# Altium PCB Copy of MC0202S_V0.91.pcbdoc
Units mm, origin at the board's own origin, x right, y up, seen from the top; angles counter-clockwise.
Board outline 121 x 80 mm, 4 copper layers (Top Layer, Mid-Layer 1, Mid-Layer 2, Bottom Layer); 151 components, 104 nets, 502 pads, 44 vias.
Unrouted connection lines stored in the file: 184.
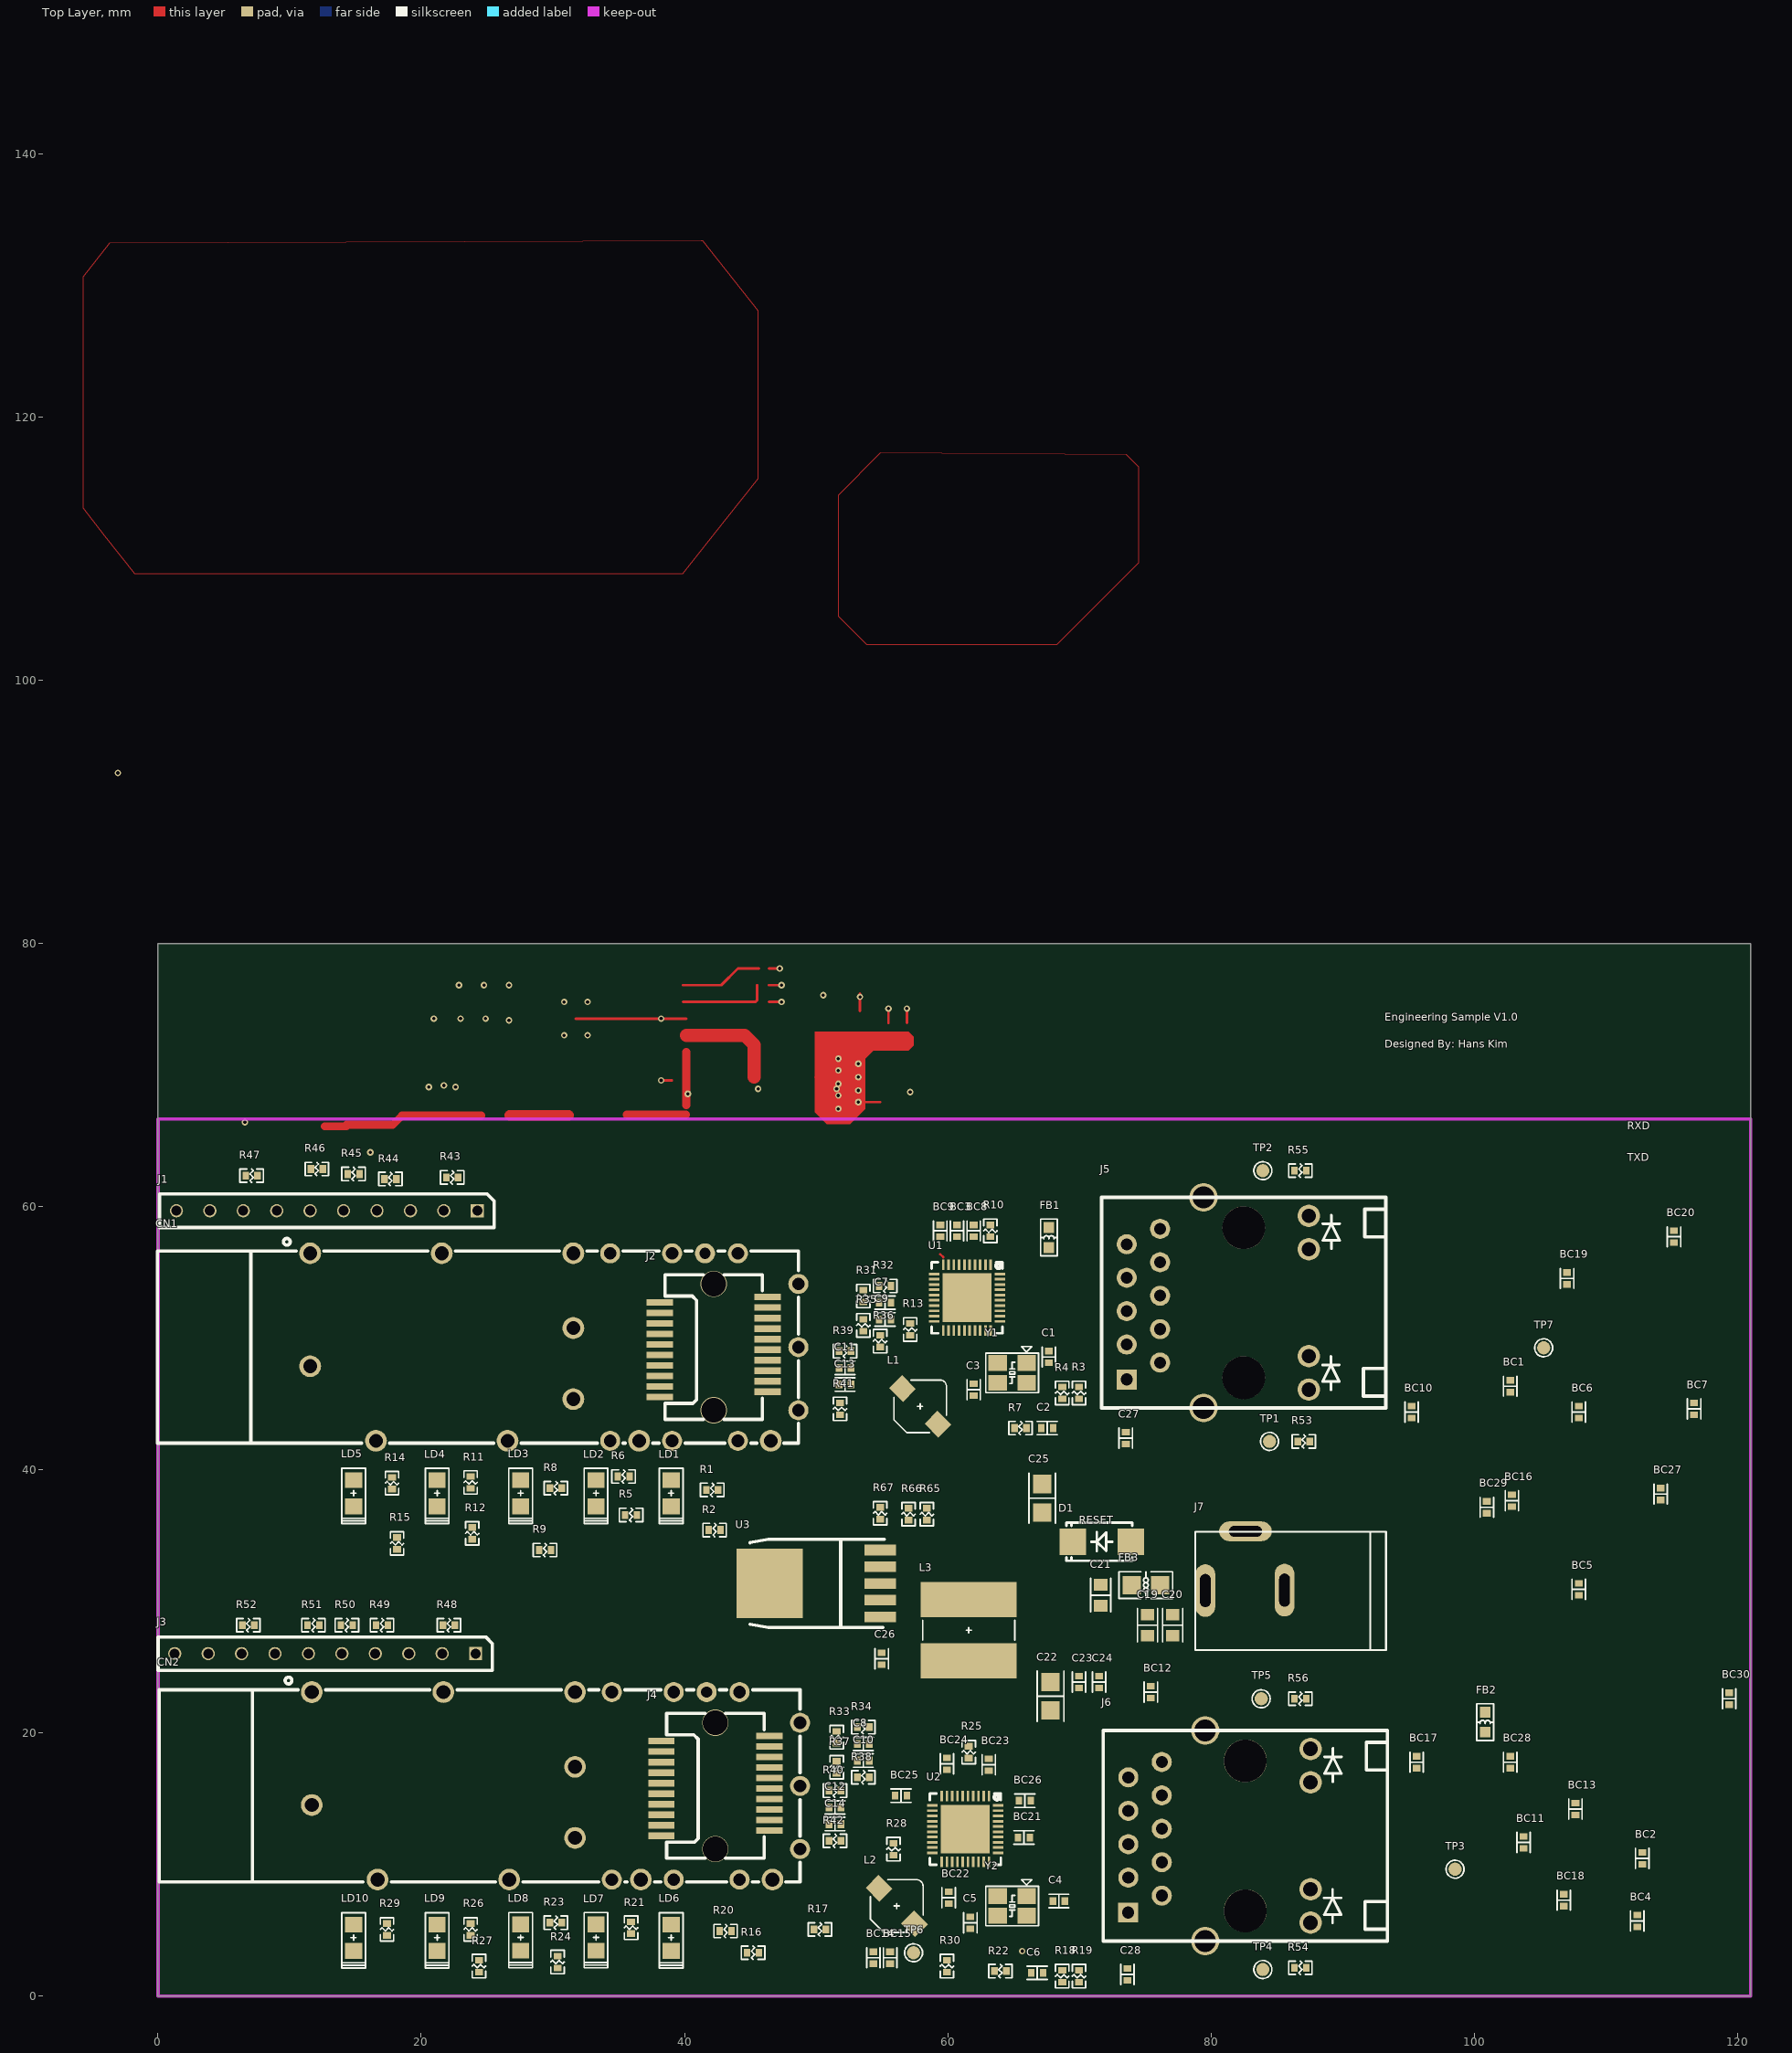
[diagram p0: Top Layer view]
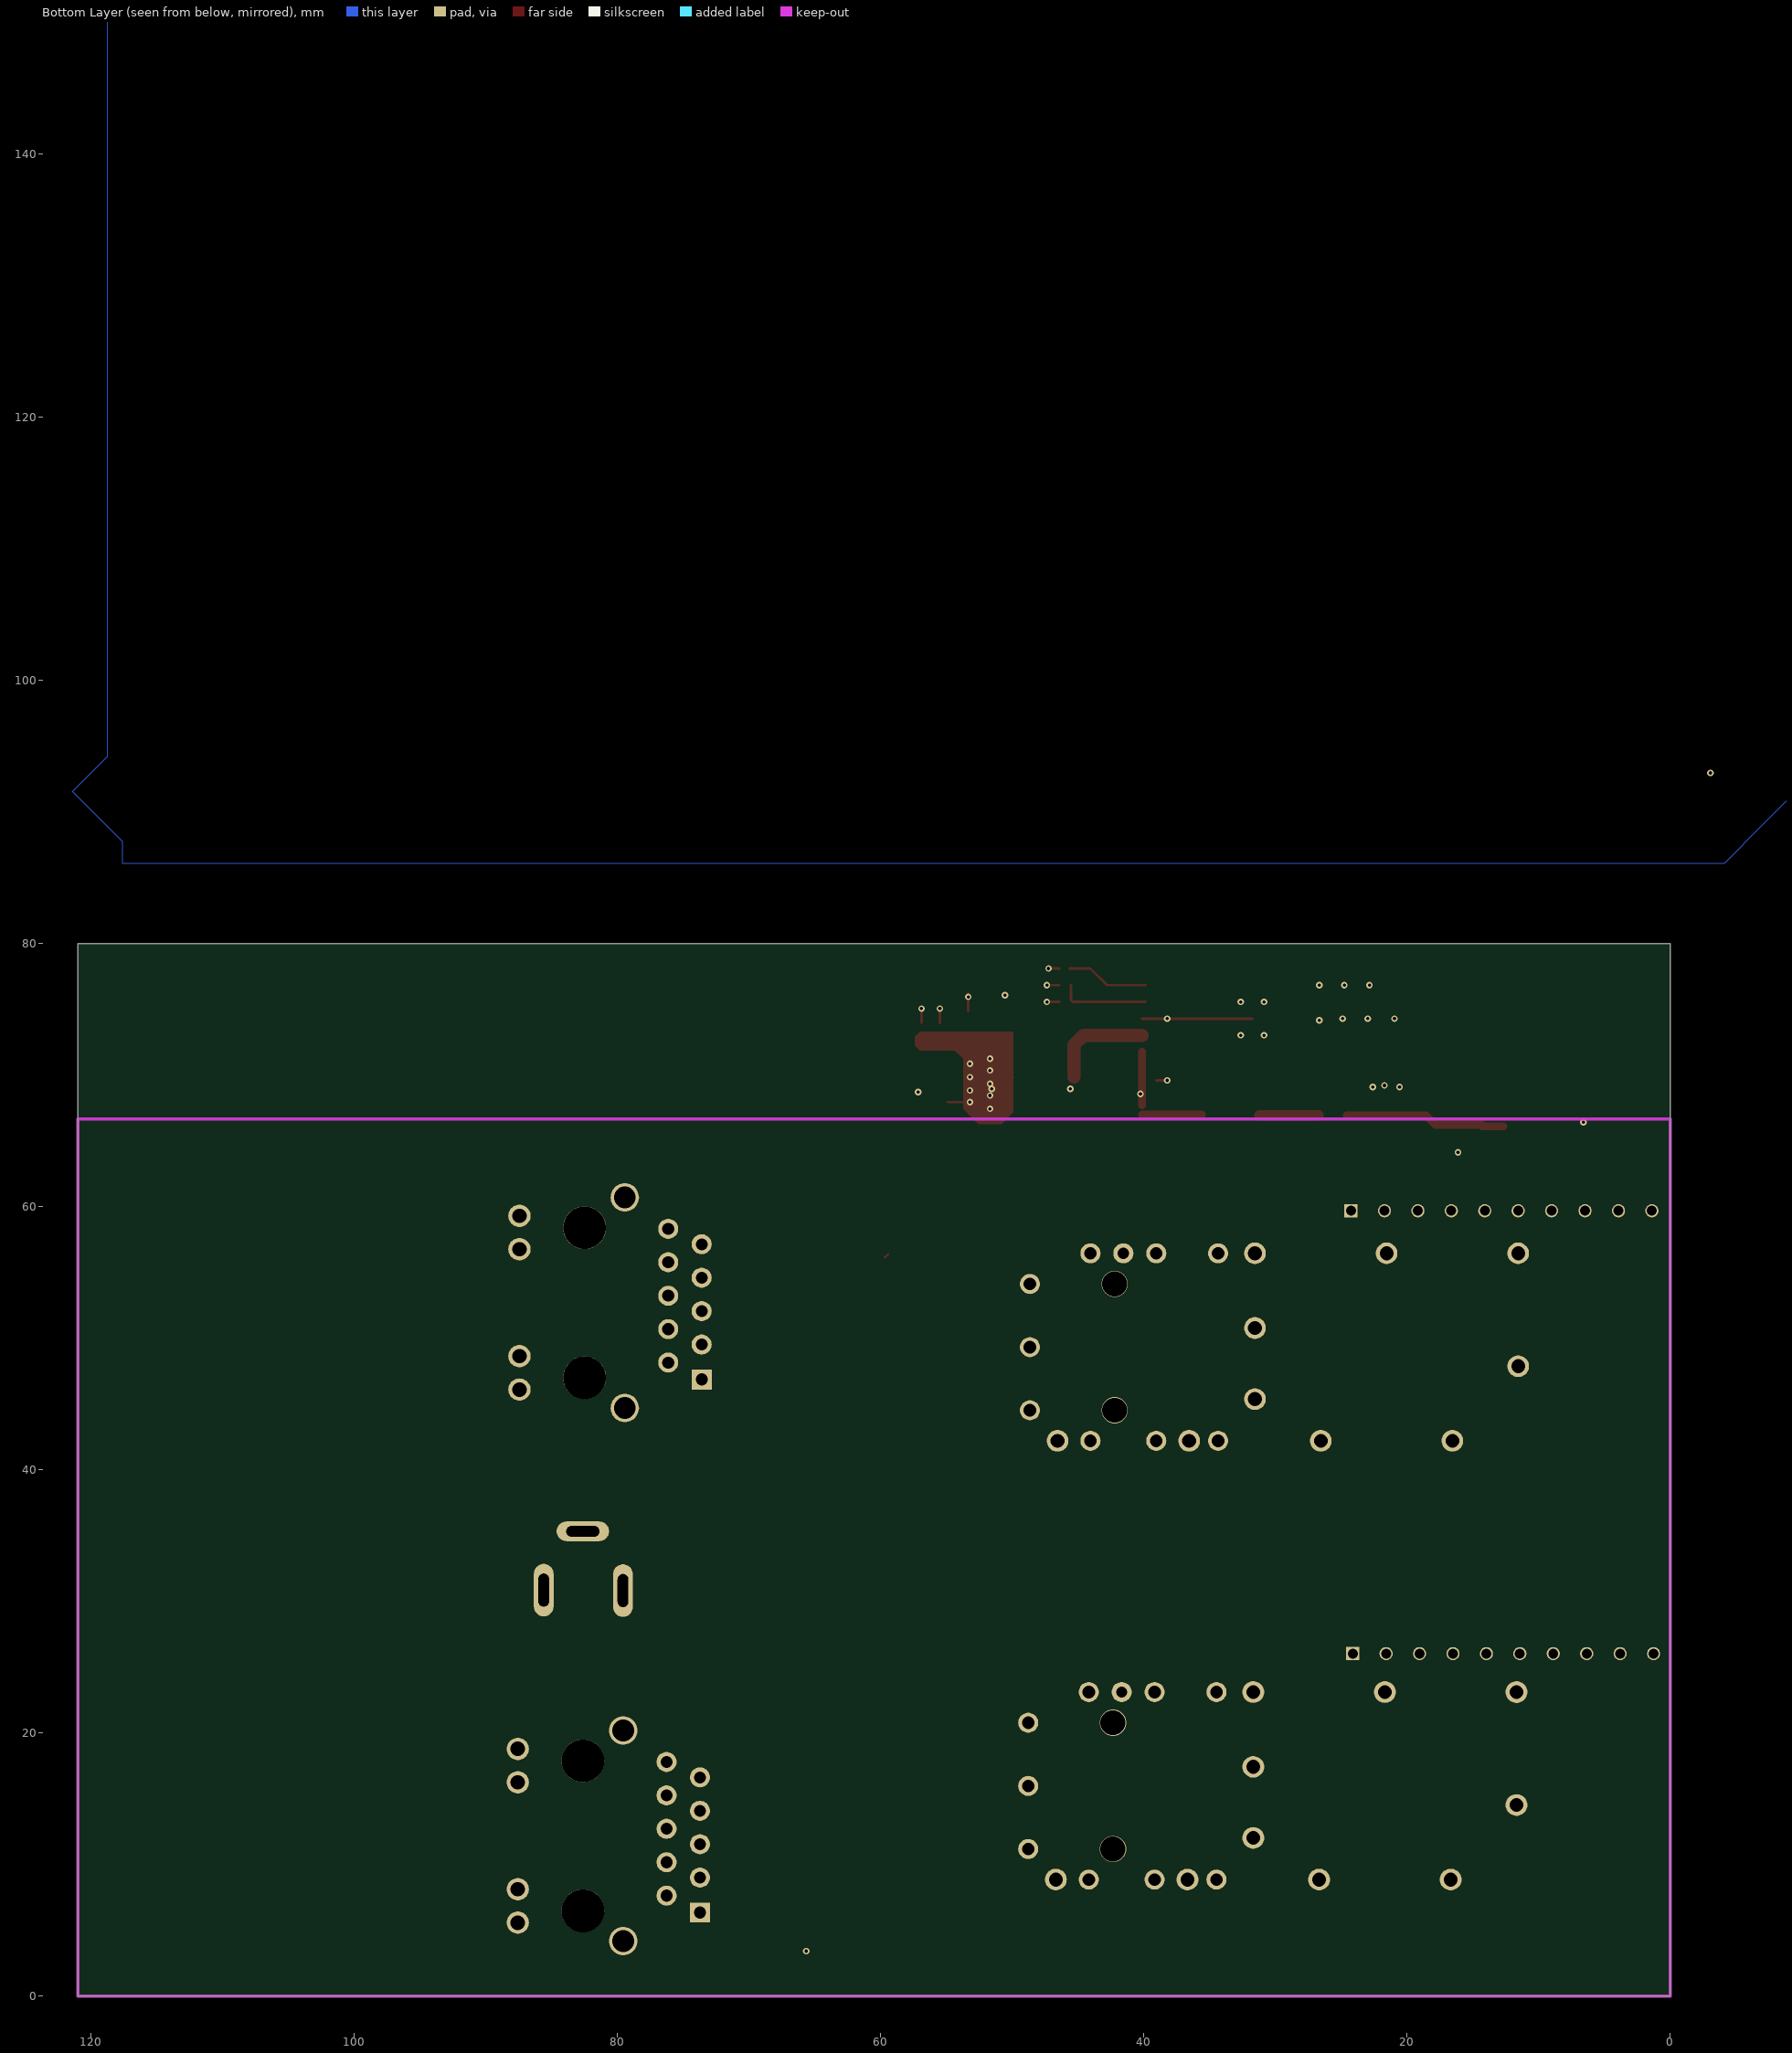
[diagram p1: Bottom Layer view, seen from below]
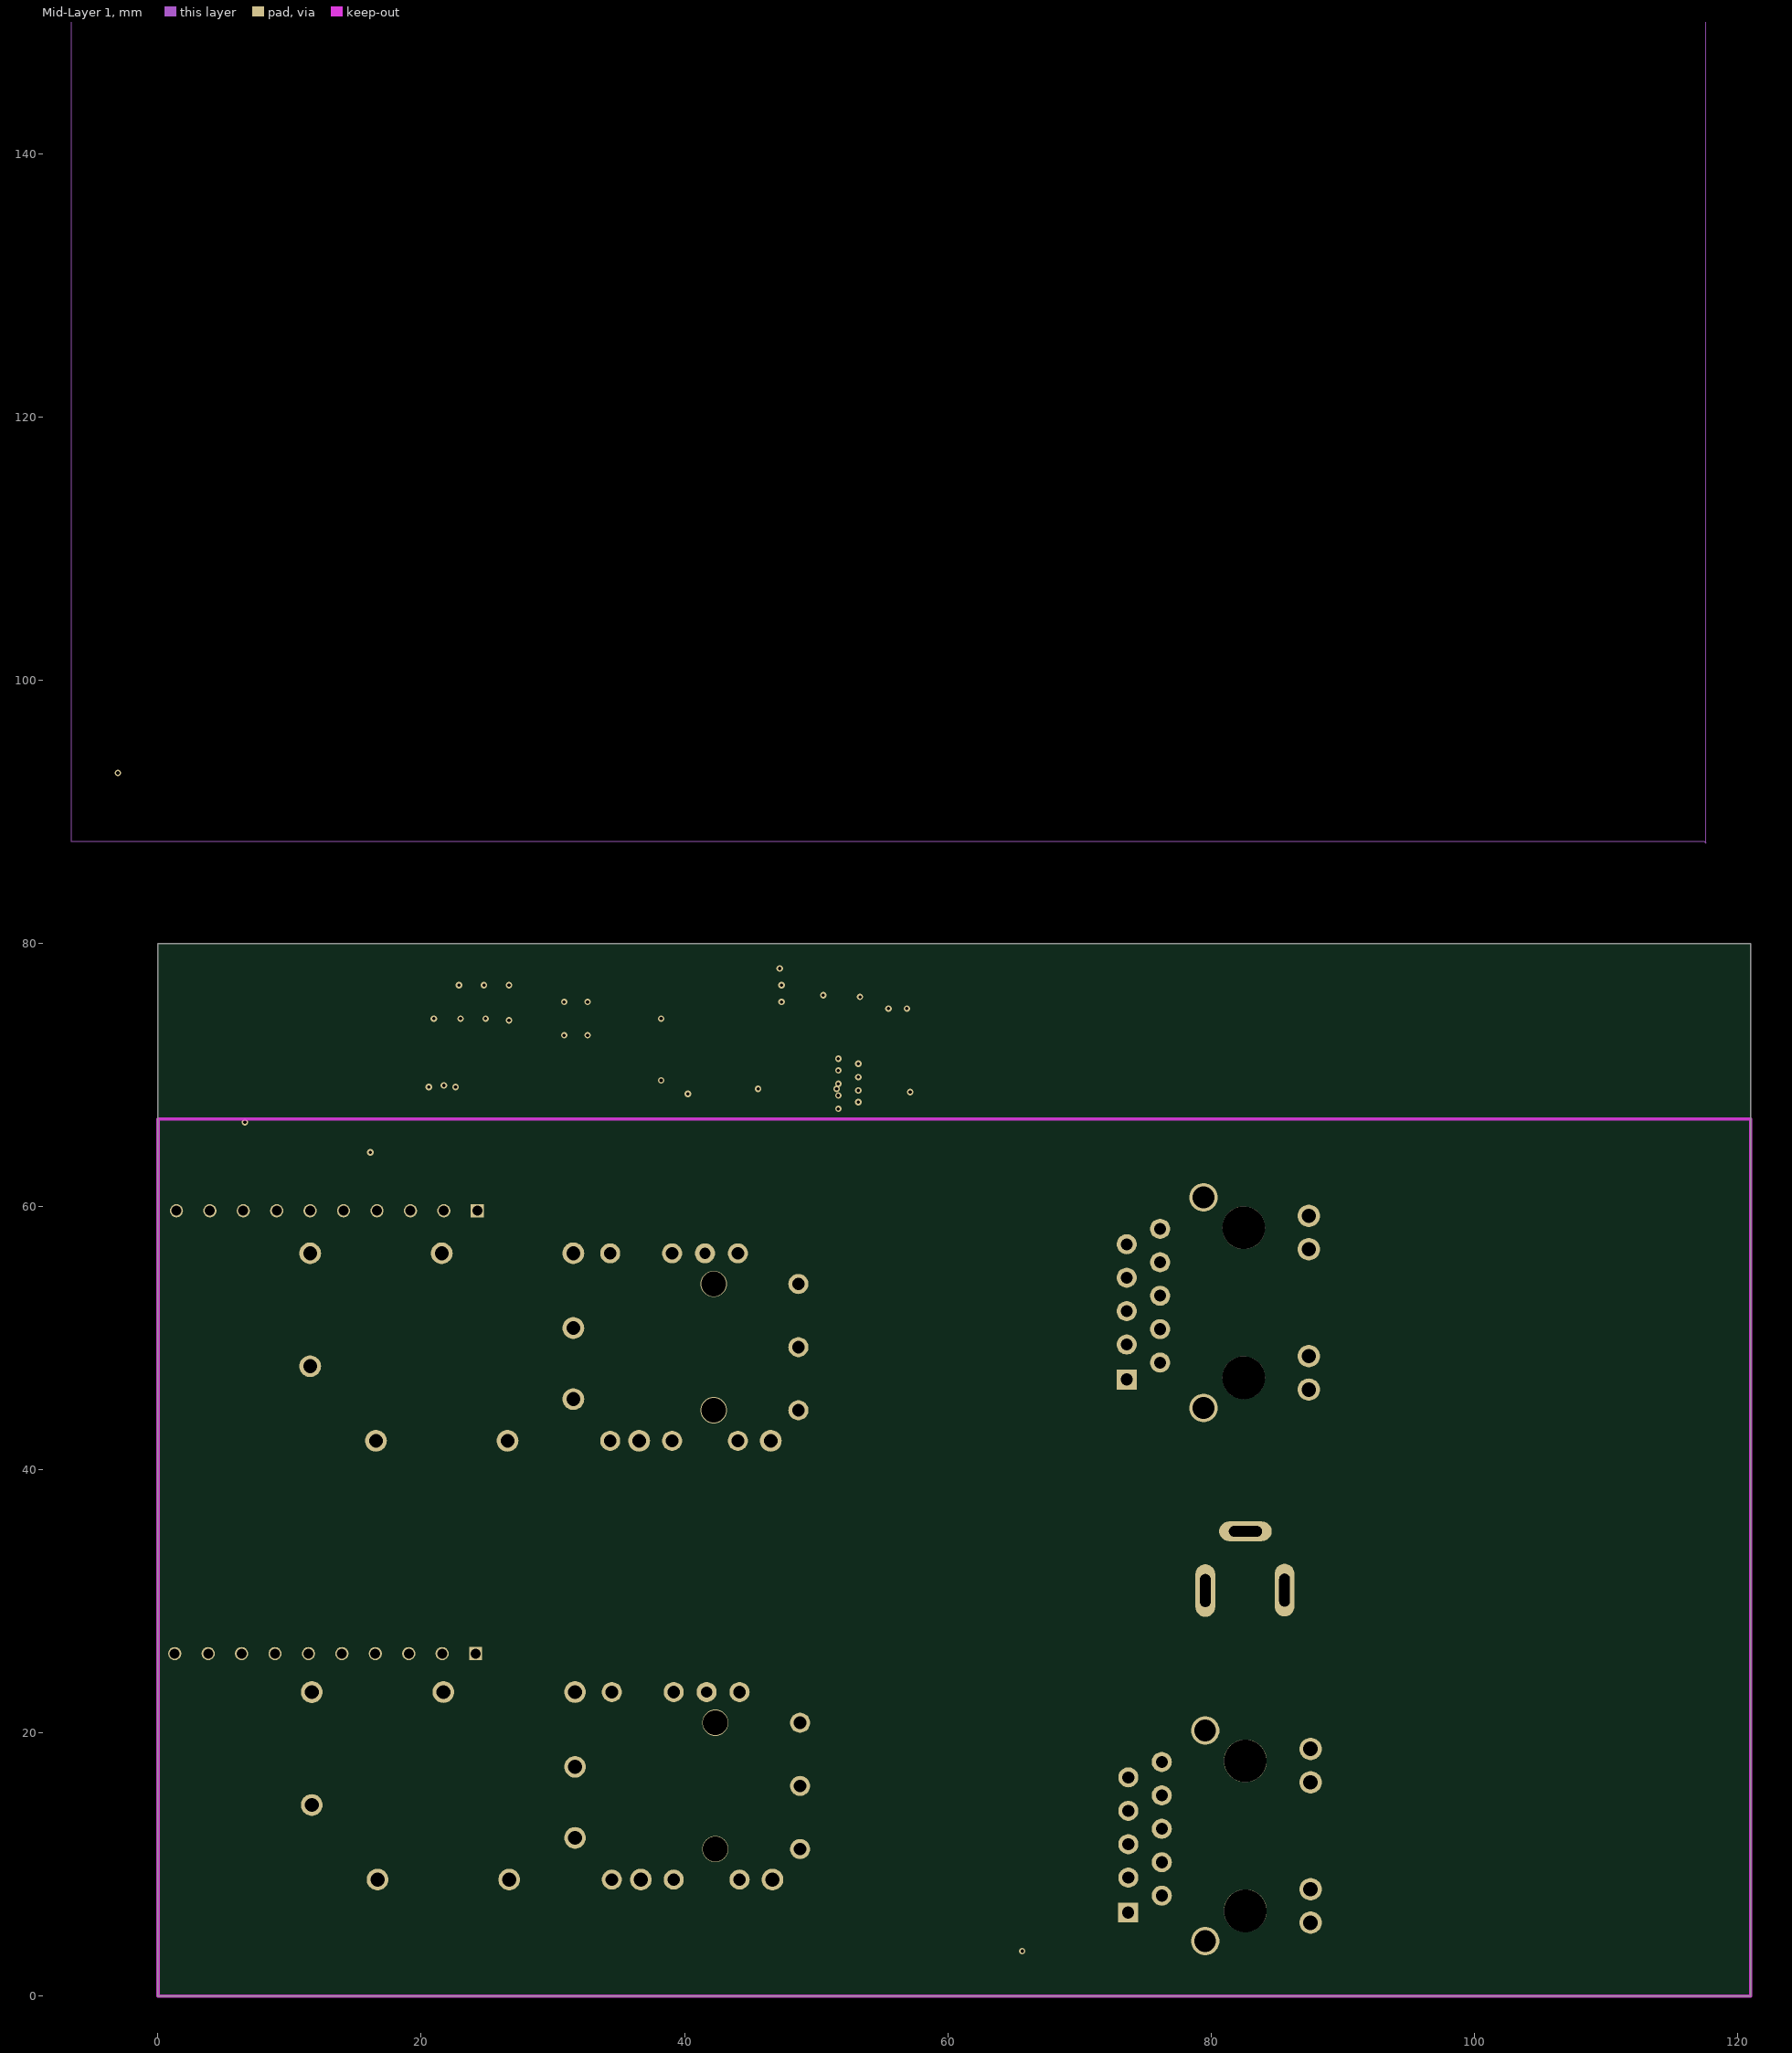
[diagram p2: Mid-Layer 1]
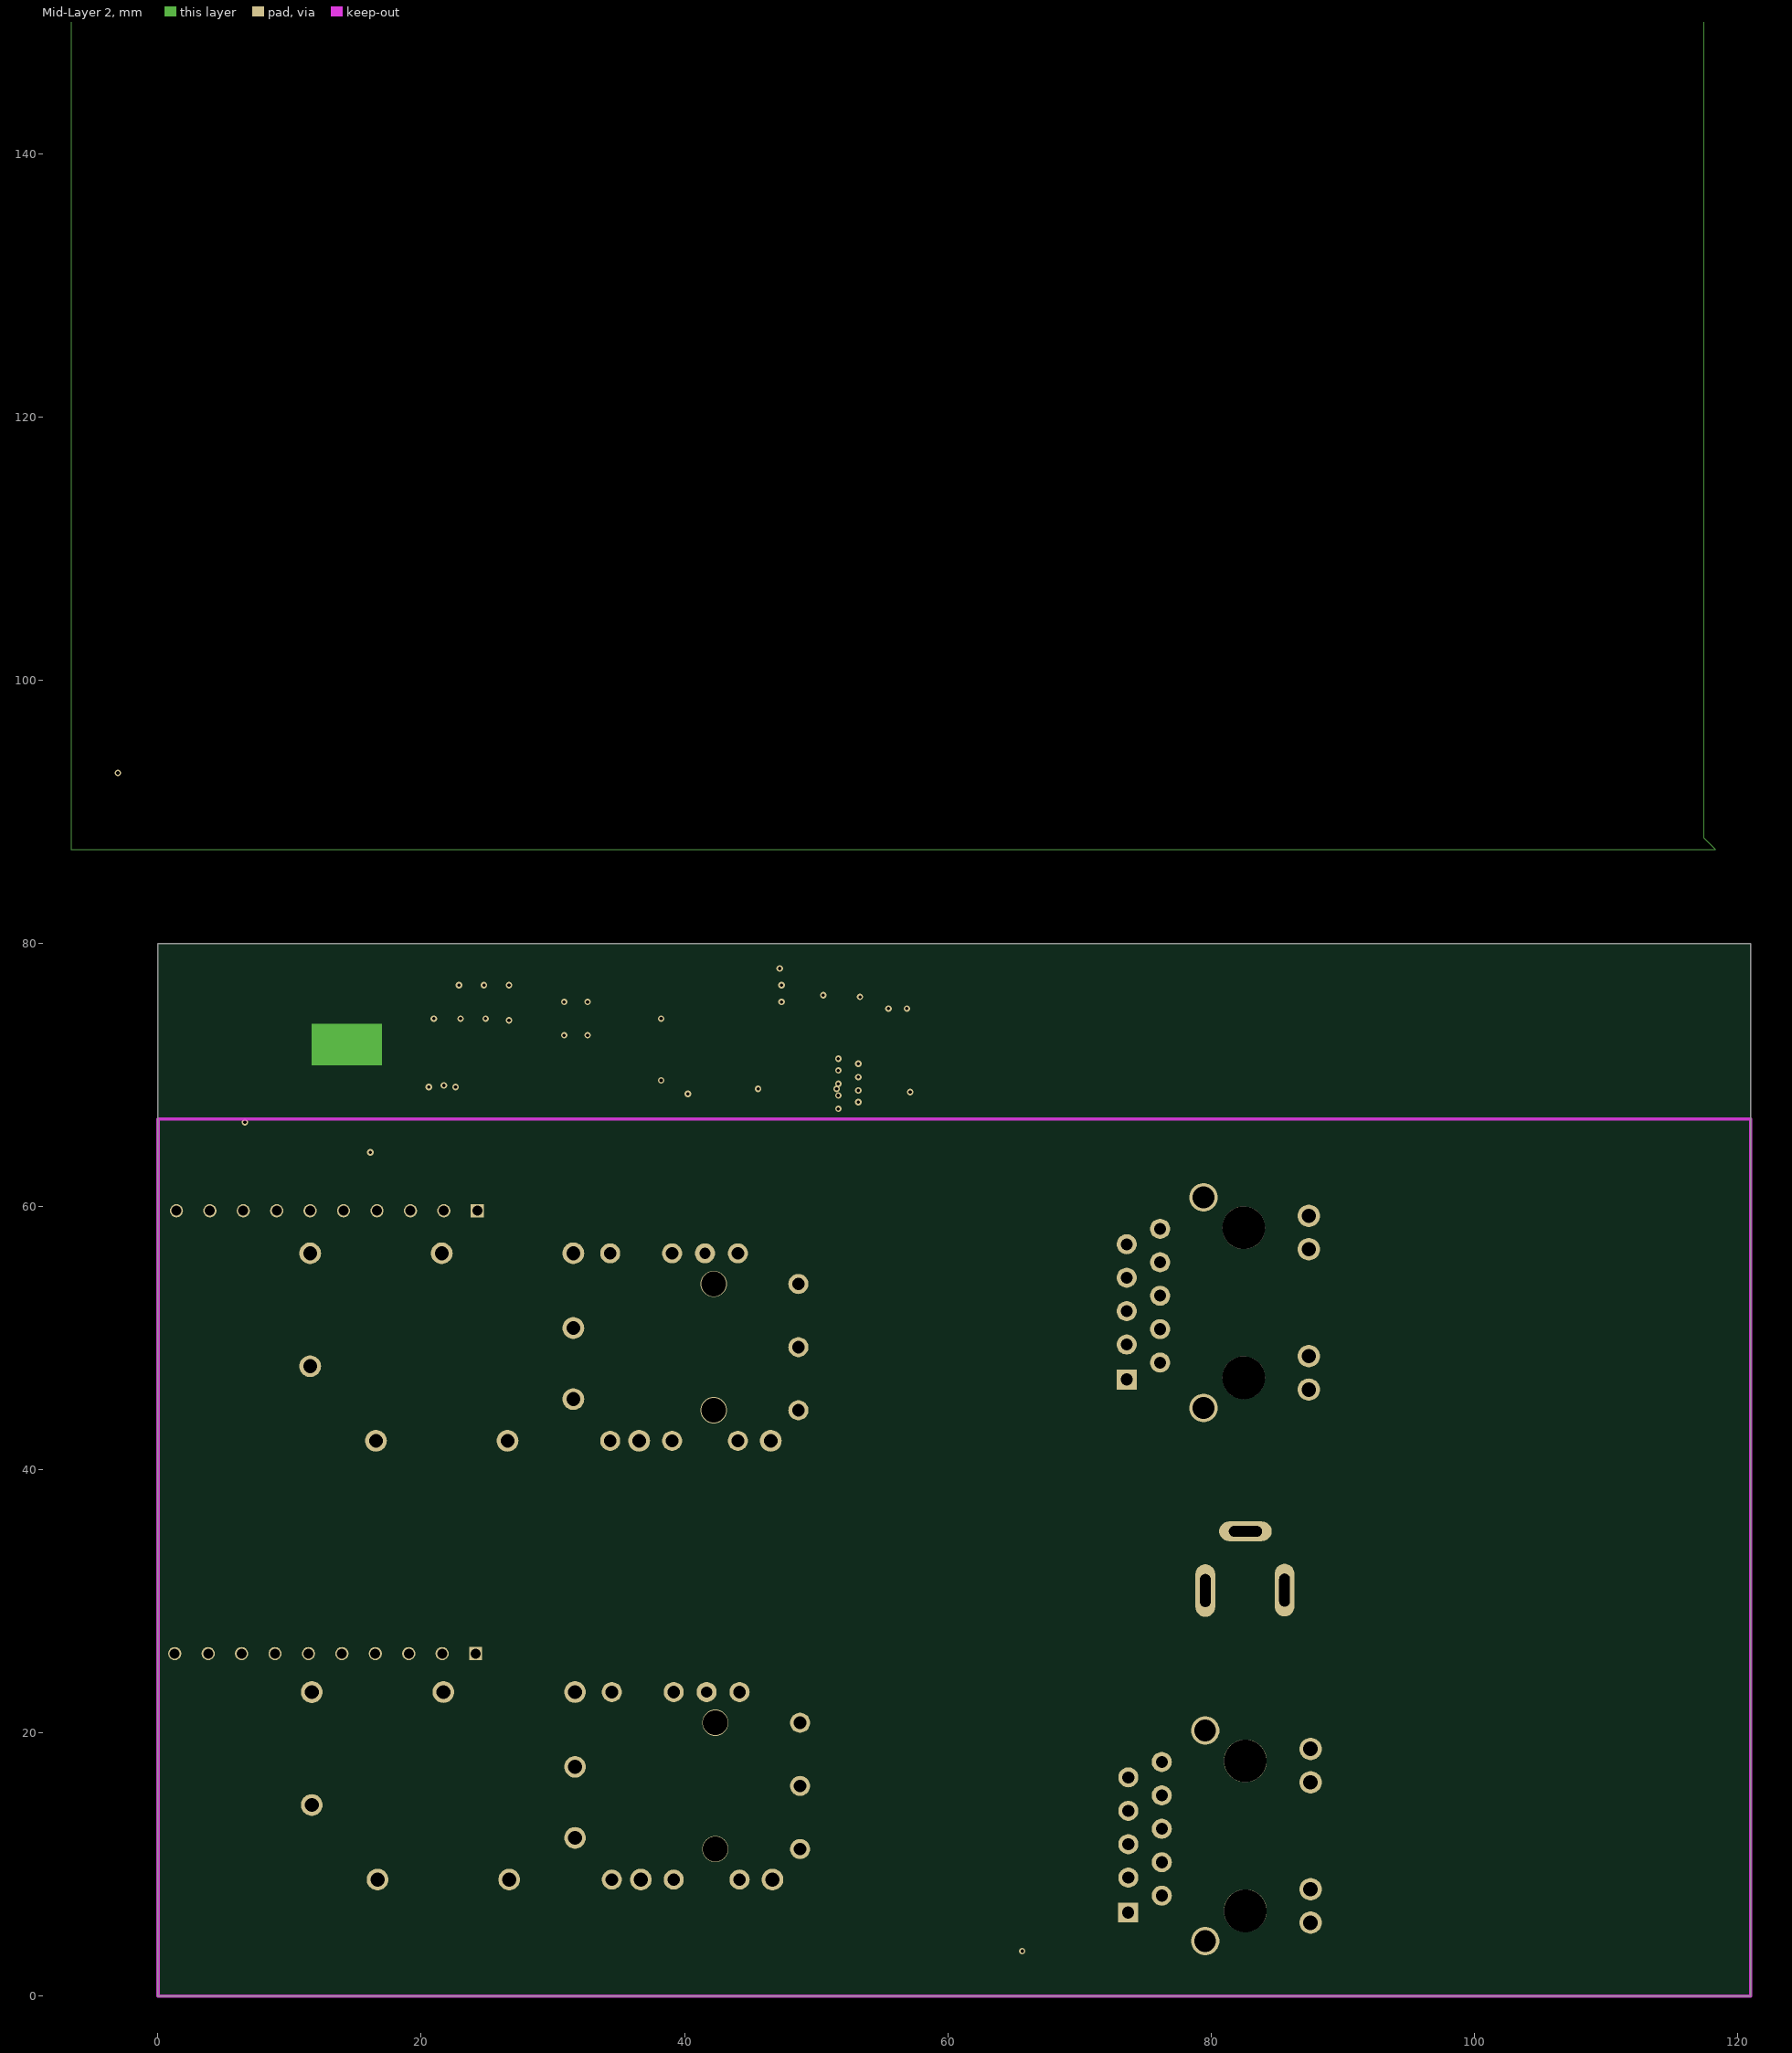
[diagram p3: Mid-Layer 2]

## Layer stack, top to bottom
Top Solder: solder mask 0.0102, Solder Resist, Dk 3.5
Top Layer: signal copper 0.0356
Dielectric1: dielectric 0.32, FR-4, Dk 4.8
Mid-Layer 1: signal copper 0.0356
Dielectric2: dielectric 0.32, FR-4, Dk 4.8
Mid-Layer 2: signal copper 0.0356
Dielectric3: dielectric 0.32, FR-4, Dk 4.8
Bottom Layer: signal copper 0.0356
Bottom Solder: solder mask 0.0102, Solder Resist, Dk 3.5

## Board outline
0,0 121,0 121,80 0,80

## Design rules (kind name [scope] priority, off if disabled: settings)
Clearance Clearance_4 [isRegion vs IsRegion] p1: gap=0.4 ignorepadtopadclearanceinfootprint=FALSE except(0: Arc-Hole Track-Hole SMDPad-Hole THPad-Hole Via-Hole Fill-Hole Poly-Hole Region-Hole Text-Hole)
Clearance Clearance_3 [HasFootprint('QFN-40_5X5') or HasFootprint('RP-4_1005') vs HasFootprint('QFN-40_5X5') or HasFootprint('RP-4_1005')] p2: gap=0.1 ignorepadtopadclearanceinfootprint=FALSE except(0: Arc-Hole Track-Hole SMDPad-Hole THPad-Hole Via-Hole Fill-Hole Poly-Hole Region-Hole Text-Hole)
Clearance Clearance_2 [InNetClass('ETH') vs InNetClass('ETH')] p3: gap=0.127 ignorepadtopadclearanceinfootprint=FALSE except(0: Arc-Hole Track-Hole SMDPad-Hole THPad-Hole Via-Hole Fill-Hole Poly-Hole Region-Hole Text-Hole)
Clearance Clearance_1 [isVia] p4: gap=0.1 ignorepadtopadclearanceinfootprint=FALSE except(0: Arc-Hole Track-Hole SMDPad-Hole THPad-Hole Via-Hole Fill-Hole Poly-Hole Region-Hole Text-Hole)
Clearance [All] p5: gap=0.2 ignorepadtopadclearanceinfootprint=FALSE except(0: Arc-Hole Track-Hole SMDPad-Hole THPad-Hole Via-Hole Fill-Hole Poly-Hole Region-Hole Text-Hole)
ComponentClearance ComponentClearance_1 [InComponent('CN1') or InComponent('CN2') vs InComponent('J2') or InComponent('J4')] p1: gap=0 collisioncheckmode=3 verticalgap=0 showdistances=FALSE
ComponentClearance [All] p2: gap=0.1 collisioncheckmode=3 verticalgap=0.1 showdistances=FALSE
HoleSize [All] p1: absolutevalues=TRUE maxlimit=5.12 minlimit=0.025 maxpercent=80.000 minpercent=20.000
MinimumSolderMaskSliver MinimumSolderMaskSliver_2 [isVia vs isVia] p1: minsoldermaskwidth=0.1
MinimumSolderMaskSliver MinimumSolderMaskSliver_1 [IsPad vs isPad] p2: minsoldermaskwidth=0.05
MinimumSolderMaskSliver [All] p3: minsoldermaskwidth=0.1
PolygonConnect [All] p1: connectstyle=Relief reliefconductorwidth=0.254 reliefentries=4 polygonreliefangle="90 Angle" airgapwidth=0.254
RoutingVias [All] p1: holewidth=0.25 width=0.5 viastyle="Through Hole" minholewidth=0.25 minwidth=0.5 maxholewidth=0.25 maxwidth=0.5
SilkToSilkClearance [All] p1: silktosilkclearance=0.01
SilkToSolderMaskClearance [IsPad] p1: minsilkscreentomaskgap=0 clearancetoexposedcopper=TRUE
SolderMaskExpansion [All] p1: expansion=0.102
Width Width_1 [InNetClass('ETH')] p1: maxlimit=0.127 minlimit=0.127 preferedwidth=0.127
Width [All] p2: maxlimit=1 minlimit=0.127 preferedwidth=0.2
25 further rules are at their usual default settings.

## Components (designator, comment, footprint, x,y, rotation, side; value= is the part's Value field where it differs from the comment)
BC1 "1uF" CS-1005 102.743,46.355 r90 top
BC2 "0.1uF" CS-1005 112.776,10.472 r90 top
BC3 "0.1uF" CS-1005 60.706,58.166 r90 top
BC4 "0.1uF" CS-1005 112.395,5.715 r90 top
BC5 "0.1uF" CS-1005 107.95,30.919 r90 top
BC6 "0.1uF" CS-1005 107.95,44.392 r90 top
BC7 "0.1uF" CS-1005 116.713,44.635 r90 top
BC8 "0.1uF" CS-1005 61.976,58.166 r90 top
BC9 "0.1uF" CS-1005 59.436,58.166 r90 top
BC10 "0.1uF" CS-1005 95.25,44.392 r90 top
BC11 "0.1uF" CS-1005 103.759,11.684 r90 top
BC12 "0.1uF" CS-1005 75.438,23.114 r90 top
BC13 "0.1uF" CS-1005 107.696,14.224 r90 top
BC14 "1uF" CS-1005 54.356,2.921 r270 top
BC15 "0.1uF" CS-1005 55.626,2.921 r270 top
BC16 "0.1uF" CS-1005 102.87,37.661 r90 top
BC17 "0.1uF" CS-1005 95.631,17.78 r90 top
BC18 "0.1uF" CS-1005 106.807,7.297 r90 top
BC19 "0.1uF" CS-1005 107.061,54.552 r90 top
BC20 "0.1uF" CS-1005 115.189,57.716 r90 top
BC21 "0.1uF" CS-1005 65.786,12.065 r0 top
BC22 "0.1uF" CS-1005 60.071,7.493 r270 top
BC23 "0.1uF" CS-1005 63.119,17.584 r90 top
BC24 "0.1uF" CS-1005 59.944,17.653 r90 top
BC25 "0.1uF" CS-1005 56.457,15.24 r180 top
BC26 "0.1uF" CS-1005 65.855,14.859 r180 top
BC27 "0.1uF" CS-1005 114.173,38.158 r90 top
BC28 "1uF" CS-1005 102.743,17.78 r90 top
BC29 "0.1uF" CS-1005 100.965,37.153 r90 top
BC30 "1uF" CS-1005 119.38,22.606 r90 top
C1 "12pF" CS-1005 67.691,48.583 r90 top
C2 "0.1uF" CS-1005 67.564,43.18 r0 top
C3 "12pF" CS-1005 61.976,46.101 r270 top
C4 "12pF" CS-1005 68.453,7.239 r0 top
C5 "12pF" CS-1005 61.722,5.588 r270 top
C6 "0.1uF" CS-1005 66.802,1.778 r0 top
C7 "0.1uF" CS-1005 55.245,52.705 r0 top
C8 "0.1uF" CS-1005 53.594,19.177 r0 top
C9 "0.1uF" CS-1005 55.245,51.435 r0 top
C10 "0.1uF" CS-1005 53.594,17.907 r0 top
C11 "0.1uF" CS-1005 52.197,47.752 r0 top
C12 "0.1uF" CS-1005 51.435,14.351 r0 top
C13 "0.1uF" CS-1005 52.197,46.482 r0 top
C14 "0.1uF" CS-1005 51.435,13.081 r0 top
C19 "0.1uF" CS-1608 75.184,28.194 r270 top
C20 "1nF" CS-1608 77.089,28.194 r270 top
C21 "0.1uF" CS-1608 71.628,30.48 r270 top
C22 "10uF" CS-2012 67.818,22.796 r270 top
C23 "0.1uF" CS-1005 69.977,23.876 r270 top
C24 "10nF" CS-1005 71.501,23.876 r270 top
C25 "10uF" CS-2012 67.183,37.846 r90 top
C26 "0.1uF" CS-1005 54.991,25.654 r270 top
C27 "0.1uF" CS-1005 73.533,42.418 r90 top
C28 "0.1uF" CS-1005 73.66,1.651 r90 top
CN1 "TH_HC-SFP-01L" TH_HC-SFP-01L 30.107,49.334 r270 top
CN2 "TH_HC-SFP-01L" TH_HC-SFP-01L 30.234,15.989 r270 top
D1 "RB051L-40" SOD-106 71.714,34.544 r180 top
FB1 "600" LS-1608 67.691,57.658 r90 top
FB2 "600" LS-1608 100.838,20.828 r90 top
FB3 "60" LS-2012 75.057,31.242 r180 top
J1 "CON 10P" Header_2.54_10p 24.257,59.69 r180 top
J2 "KSP20LG154" KSP20LG154 42.219,49.334 r270 top
J3 "CON 10P" Header_2.54_10p 24.13,26.035 r180 top
J4 "KSP20LG154" KSP20LG154 42.346,15.989 r270 top
J5 "HR911130A" HR911130A 80.518,52.705 r90 top
J6 "HR911130A" HR911130A 80.645,12.192 r90 top
J7 "DC005" DC005 82.819,30.92 r270 top
L1 "2.2uH" CDRH3D16NP 57.912,44.831 r270 top
L2 "2.2uH" CDRH3D16NP 56.134,6.858 r270 top
L3 "100uH" CDRH6D38NP 61.595,27.813 r0 top
LD1 "LED" LED2012 38.989,38.227 r90 top
LD2 "LED" LED2012 33.274,38.227 r90 top
LD3 "LED" LED2012 27.559,38.227 r90 top
LD4 "LED" LED2012 21.209,38.227 r90 top
LD5 "LED" LED2012 14.859,38.227 r90 top
LD6 "LED" LED2012 38.989,4.445 r90 top
LD7 "LED" LED2012 33.274,4.461 r90 top
LD8 "LED" LED2012 27.559,4.461 r90 top
LD9 "LED" LED2012 21.209,4.445 r90 top
LD10 "LED" LED2012 14.859,4.445 r90 top
R1 "470" RS-1005 42.106,38.481 r0 top
R2 "4.7K" RS-1005 42.291,35.433 r0 top
R3 "4.7K" RS-1005 69.977,45.847 r90 top
R4 "4.7K" RS-1005 68.707,45.847 r90 top
R5 "4.7K" RS-1005 35.941,36.576 r0 top
R6 "470" RS-1005 35.375,39.497 r0 top
R7 "4.7K" RS-1005 65.532,43.18 r0 top
R8 "4.7K" RS-1005 30.226,38.608 r0 top
R9 "4.7K" RS-1005 29.406,33.909 r0 top
R10 "2.5K_F" RS-1005 63.246,58.166 r270 top
R11 "4.7K" RS-1005 23.749,39.047 r90 top
R12 "4.7K" RS-1005 23.876,35.179 r90 top
R13 "4.7K" RS-1005 57.15,50.673 r90 top
R14 "470" RS-1005 17.78,38.989 r90 top
R15 "4.7K" RS-1005 18.161,34.417 r90 top
R16 "470" RS-1005 45.212,3.302 r0 top
R17 "4.7K" RS-1005 50.292,5.08 r180 top
R18 "4.7K" RS-1005 68.707,1.524 r90 top
R19 "4.7K" RS-1005 69.977,1.524 r90 top
R20 "4.7K" RS-1005 43.122,4.953 r180 top
R21 "470" RS-1005 35.941,5.207 r90 top
R22 "4.7K" RS-1005 64.008,1.905 r0 top
R23 "4.7K" RS-1005 30.226,5.588 r180 top
R24 "4.7K" RS-1005 30.353,2.598 r90 top
R25 "2.5K_F" RS-1005 61.595,18.542 r270 top
R26 "4.7K" RS-1005 23.749,5.08 r90 top
R27 "4.7K" RS-1005 24.384,2.286 r90 top
R28 "4.7K" RS-1005 55.88,11.176 r90 top
R29 "470" RS-1005 17.399,5.08 r90 top
R30 "4.7K" RS-1005 59.944,2.286 r90 top
R31 "10K" RS-1005 53.594,53.213 r90 top
R32 "10K" RS-1005 55.245,53.975 r180 top
R33 "10K" RS-1005 51.562,19.685 r90 top
R34 "10K" RS-1005 53.594,20.447 r180 top
R35 "10K" RS-1005 53.594,50.985 r270 top
R36 "10K" RS-1005 54.864,49.784 r90 top
R37 "10K" RS-1005 51.562,17.399 r270 top
R38 "10K" RS-1005 53.594,16.637 r180 top
R39 "10K" RS-1005 52.197,49.022 r180 top
R40 "10K" RS-1005 51.435,15.621 r180 top
R41 "10K" RS-1005 51.816,44.635 r90 top
R42 "10K" RS-1005 51.435,11.811 r180 top
R43 "10K" RS-1005 22.352,62.23 r0 top
R44 "10K" RS-1005 17.653,62.103 r0 top
R45 "10K" RS-1005 14.859,62.484 r0 top
R46 "10K" RS-1005 12.065,62.865 r0 top
R47 "10K" RS-1005 7.112,62.357 r0 top
R48 "10K" RS-1005 22.098,28.194 r0 top
R49 "10K" RS-1005 17.018,28.194 r0 top
R50 "10K" RS-1005 14.351,28.194 r0 top
R51 "10K" RS-1005 11.811,28.194 r0 top
R52 "10K" RS-1005 6.858,28.194 r0 top
R53 "470" RS-1005 87.053,42.164 r0 top
R54 "470" RS-1005 86.799,2.159 r0 top
R55 "470" RS-1005 86.799,62.738 r0 top
R56 "470" RS-1005 86.799,22.606 r0 top
R65 "10K_1%" RS-1005 58.42,36.634 r90 top
R66 "6K_1%" RS-1005 57.023,36.634 r270 top
R67 "0" RS-1005 54.864,36.703 r270 top
TP1 "LED0" TP-SMD(1.0) 84.455,42.164 r90 top
TP2 "LED1" TP-SMD(1.0) 83.947,62.738 r90 top
TP3 "3.3V" TP-SMD(1.0) 98.552,9.652 r90 top
TP4 "LED0" TP-SMD(1.0) 83.947,2.032 r90 top
TP5 "LED1" TP-SMD(1.0) 83.82,22.606 r90 top
TP6 "3.3V" TP-SMD(1.0) 57.404,3.302 r90 top
TP7 "3.3V" TP-SMD(1.0) 105.283,49.276 r90 top
U1 "RTL8213B" QFN-40_5x5 61.468,53.086 r180 top
U2 "RTL8213B" QFN-40_5x5 61.341,12.7 r180 top
U3 "XL7015E1" TO252-5L 50.673,31.369 r90 top
Y1 "25MHz-S20P-SX32" SX-32 64.897,47.371 r0 top
Y2 "25MHz-S20P-SX32" SX-32 64.897,6.858 r0 top

## Footprints (in the part's own frame and the unit in brackets; to place one, negate y for a bottom-side part, rotate by r counter-clockwise, add the part's x,y. Pads: shape width x height; smd on the part's side, far side on the other; paste and mask are expansions set on the pad)
CDRH3D16NP [mm]
  rect 1.5x1.4 smd rot 45: 1(1.35,1.35) 2(-1.35,-1.35)
  Top Layer pour cut-out: -1.973,1.727 -2,-0.7 -0.7,-2 1.025,-2 2,-1.025 2,0.7 0.7,2 -1.7,2
  silkscreen extent -2,-2 2,2
CDRH6D38NP [mm]
  rect 7.3x2.65 smd: 1(0,-2.325) 2(0,2.325)
  silkscreen extent -3.5,-0.75 3.5,0.75
CS-1005 [mm]
  rect 0.5x0.6 smd: 1(-0.45,0) 2(0.45,0)
  silkscreen extent -0.76,-0.51 0.76,0.51
CS-1608 [mil]
  rect 35x40 smd: 1(-31.5,0) 2(31.5,0)
  silkscreen extent -50,-30 50,30
CS-2012 [mil]
  rect 55x55 smd: 1(-42.5,0) 2(42.5,0)
  silkscreen extent -75,-40 75,40
DC005 [mm]
  oval 4x1.5 hole 0.8 slot 2.5 at 0 deg: 1(0.059,2.779) 3(0.092,-3.243)
  oval 1.5x4 hole 0.8 slot 2.5 at 90 deg: 2(-4.41,-0.191)
  silkscreen extent -4.38,-4.01 4.62,10.49
Header_2.54_10p [mm]
  rect 1x1 hole 0.762: 1(0,0)
  round 1 hole 0.762: 2(2.54,0) 3(5.08,0) 4(7.62,0) 5(10.16,0) 6(12.7,0) 7(15.24,0) 8(17.78,0) 9(20.32,0) 10(22.86,0)
  silkscreen extent -1.27,-1.27 24.13,1.27
HR911130A [mil]
  rect 60x60 hole 35.83 paste+0 mask+2: 1(-229.63,272.62)
  round 60 hole 35.83 paste+0 mask+2: 2(-179.1,172.38) 3(-125.2,272.38) 4(-79.1,172.38) 5(-25.2,272.38) 6(20.9,172.38) 7(74.8,272.38) 8(120.9,172.38) 9(174.8,272.38) 10(220.9,172.38)
  round 66.93 hole 43.31 paste+0 mask+2: 11(-260,-272.62) 12(-160,-272.62) 13(160,-272.62) 14(260,-272.62)
  round 85 hole 65 paste+0 mask+2: M1(-315,42.48) M2(315,42.48)
  round 127.95 hole 127.95 unplated paste+0: ""(-224.4,-77.62) ""(224.4,-77.62)
  silkscreen extent -315,-503 315,347
KSP20LG154 [mm]
  rect 0.5x2 smd paste+0 mask+0.051: 1(-3.4,-4.1) 2(-2.6,-4.1) 3(-1.8,-4.1) 4(-1,-4.1) 5(-0.2,-4.1) 6(0.6,-4.1) 7(1.4,-4.1) 8(2.2,-4.1) 9(3,-4.1) 10(3.8,-4.1) 11(3.4,4.1) 12(2.6,4.1) 13(1.8,4.1) 14(1,4.1) 15(0.2,4.1) 16(-0.6,4.1) 17(-1.4,4.1) 18(-2.2,4.1) 19(-3,4.1) 20(-3.8,4.1)
  silkscreen extent -5.5,-3.7 5.5,3.7
LED2012 [mil]
  rect 47x51 smd: 1(39.37,0) 2(-39.37,0)
  silkscreen extent -91,-35 75,35
LS-1608 [mil]
  rect 32x32 smd: 1(-30,0) 2(30,0)
  silkscreen extent -55,-25 55,25
LS-2012 [mil]
  rect 55x55 smd: 1(-42.5,0) 2(42.5,0)
  silkscreen extent -80,-40 80,40
QFN-40_5x5 [mm]
  rect 0.2x0.8 smd paste-100 mask+0.05: 1(-1.8,-2.499) 2(-1.4,-2.499) 3(-1,-2.499) 4(-0.6,-2.499) 5(-0.2,-2.499) 6(0.2,-2.499) 7(0.6,-2.499) 8(1,-2.499) 9(1.4,-2.499) 10(1.8,-2.499) 21(1.8,2.499) 22(1.4,2.499) 23(1,2.499) 24(0.6,2.499) 25(0.2,2.499) 26(-0.2,2.499) 27(-0.6,2.499) 28(-1,2.499) 29(-1.4,2.499) 30(-1.8,2.499)
  rect 0.8x0.2 smd paste-100 mask+0.05: 11(2.499,-1.8) 12(2.499,-1.4) 13(2.499,-1) 14(2.499,-0.6) 15(2.499,-0.2) 16(2.499,0.2) 17(2.499,0.6) 18(2.499,1) 19(2.499,1.4) 20(2.499,1.8) 31(-2.499,1.8) 32(-2.499,1.4) 33(-2.499,1) 34(-2.499,0.6) 35(-2.499,0.2) 36(-2.499,-0.2) 37(-2.499,-0.6) 38(-2.499,-1) 39(-2.499,-1.4) 40(-2.499,-1.8)
  rect 3.7x3.7 smd paste-100 mask+0.05: PAD(0,0)
  silkscreen extent -2.7,-2.7 2.7,2.7
RS-1005 [mm]
  rect 0.5x0.6 smd: 1(-0.45,0) 2(0.45,0)
  silkscreen extent -0.89,-0.51 0.89,0.51
SOD-106 [mm]
  rrect0% 2x2 smd: 1(-2.2,0) 2(2.2,0)
  silkscreen extent -2.3,-1.45 2.7,1.45
SX-32 [mm]
  rect 1.4x1.2 smd: 1(1.1,0.75) 2(-1.1,0.75) 3(-1.1,-0.75) 4(1.1,-0.75)
  silkscreen extent -2,-1.5 2,2
TH_HC-SFP-01L [mm]
  round 1.65 hole 1.05 paste+0 mask+0.05: 1(-7.125,-18.55) 2(-7.125,-8.55) 3(-7.125,1.45) 11(7.125,16.45) 14(7.125,6.45) 16(7.125,-3.55) 17(7.125,-13.55) 18(1.455,-18.55) 19(3.955,1.45) 20(-1.445,1.45)
  round 1.524 hole 0.95 paste+0 mask+0.05: 4(-7.125,4.25) 5(-7.125,8.95) 7(-7.125,13.95) 8(-4.795,18.55) 9(0.005,18.55) 10(4.805,18.55) 12(7.125,13.95) 13(7.125,8.95) 15(7.125,4.25)
  round 1.524 hole 0.85 paste+0 mask+0.05: 6(-7.125,11.45)
  silkscreen extent -8.25,-30.15 7.3,18.55
TO252-5L [mm]
  rect 0.8x2.4 smd: 1(-2.54,-4.2) 2(-1.27,-4.2) 3(0,-4.2) 4(1.27,-4.2) 5(2.54,-4.2)
  rect 5.3x5 smd: 6(0,4.2)
  silkscreen extent -3.35,-4.5 3.35,5.7
TP-SMD(1.0) [mm]
  round 1 smd: 1(0,0)
  silkscreen extent -0.68,-0.68 0.68,0.68

## Via types
v1: diameter 0.5, hole 0.25, Top Layer to Bottom Layer, 40 vias
v2: diameter 2, hole 1.9, Top Layer to Bottom Layer, 4 vias

## Nets (pads, with @x,y where several pads share a name; then routed paths per layer and width w, separated by ;. In a path a pad name is that pad's centre, name@x,y a point inside that pad or via, vN(x,y) a via of type N, cw(c..) or ccw(c..) an arc to the next point about the centre after c; other vN are vias at no path point)
+3.3V: BC3.1 BC4.1 BC5.1 BC6.1 BC7.1 BC16.1 BC17.1 BC18.1 BC19.1 BC20.1 C22.1 C23.1 C24.1 FB1.1 FB2.1 J5.11 J5.13 J6.11 J6.13 L3.1 R1.1 R2.1 R3.1 R4.1 R5.1 R6.1 R7.1 R8.1 R9.1 R11.1 R12.1 R13.1 R16.1 R17.1 R18.1 R19.1 R20.1 R21.1 R22.1 R23.1 R24.1 R26.1 R27.1 R28.1 R65.2 TP7.1 U1.7 U1.14 U1.19 U1.20 U1.21 U1.28 U1.35 U2.7 U2.14 U2.19 U2.20 U2.21 U2.28 U2.35
AGND: BC1.2 BC2.2 BC3.2 BC4.2 BC5.2 BC6.2 BC7.2 BC8.2 BC9.2 BC10.2 BC11.2 BC12.2 BC13.2 BC14.2 BC15.2 BC16.2 BC17.2 BC18.2 BC19.2 BC20.2 BC21.2 BC22.2 BC23.2 BC24.2 BC25.2 BC26.2 BC27.1 BC28.1 BC29.1 BC30.1 C1.2 C2.2 C3.2 C4.2 C5.2 C6.2 C19.2 C20.2 C21.2 C22.2 C23.2 C24.2 C25.2 C26.2 C27.1 C28.1 CN1.1 CN1.2 CN1.3 CN1.4 CN1.5 CN1.6 CN1.7 CN1.8 CN1.9 CN1.10 CN1.11 CN1.12 CN1.13 CN1.14 CN1.15 CN1.16 CN1.17 CN1.18 CN1.19 CN1.20 CN2.1 CN2.2 CN2.3 CN2.4 CN2.5 CN2.6 CN2.7 CN2.8 CN2.9 CN2.10 CN2.11 CN2.12 CN2.13 CN2.14 CN2.15 CN2.16 CN2.17 CN2.18 CN2.19 CN2.20 J1.9 J1.10 J2.1 J2.9 J2.10 J2.11 J2.14 J2.17 J2.20 J3.9 J3.10 J4.1 J4.9 J4.10 J4.11 J4.14 J4.17 J4.20 J5.10 J5.M1 J5.M2 J6.10 J6.M1 J6.M2 J7.1 LD5.2 LD10.2 R10.1 R15.2 R25.1 R30.2 R32.1 R34.1 R36.1 R38.1 R39.1 R40.1 R41.1 R42.1 R66.1 R67.1 U1.16 U1.PAD U2.16 U2.PAD U3.3 U3.6 Y1.2 Y1.4 Y2.2 Y2.4
  other v1: 65.659,3.429 16.129,64.135 6.604,66.421 57.15,68.707 45.593,68.961 51.562,68.961 26.67,74.168 20.955,74.295 22.987,74.295 24.892,74.295 50.546,76.073 22.86,76.835 24.765,76.835 26.67,76.835 -3.048,92.964
N01813: R10.2 U1.5
N01857: R13.2 U1.15
N02024: L1.2 U1.17 U1.18
N03411: L3.2 U3.2
N03467: R65.1 R66.2 U3.4
N04286: C25.1 C26.1 D1.2 U3.1
N04319: C19.1 C20.1 FB3.1 J7.3
N04493: R67.2 U3.5
N20626: J1.2 J2.2 R43.1
N20630: J1.3 J2.3
N20636: J1.4 J2.4 R44.1
N20642: J1.5 J2.5 R45.1
N20648: J1.6 J2.6 R46.1
N20654: J1.7 J2.7
N20660: J1.8 J2.8 R47.1
N22123: J3.2 J4.2 R48.1
N22131: J3.4 J4.4 R49.1
N22135: J3.5 J4.5 R50.1
N22139: J3.6 J4.6 R51.1
N22147: J3.8 J4.8 R52.1
N22159: J3.3 J4.3
N22191: J3.7 J4.7
N048171: LD4.1 R11.2
N049111: LD3.1 R8.2
N049271: LD2.1 R6.2
N052690: LD1.1 R1.2
N053670: LD5.1 R14.2
N88350: C21.1 D1.1 FB3.2
N96447: R25.2 U2.5
N96633: L2.2 U2.17 U2.18
N96771: R28.2 U2.15
N113878: J5.12 R53.2
N115541: J5.14 R55.2
N116614: J6.12 R54.2
N116618: J6.14 R56.2
N117614: C27.2 J5.1
N118028: C28.2 J6.1
N954571: LD6.1 R16.2
N955931: LD7.1 R21.2
N961031: LD8.1 R23.2
N965031: LD9.1 R26.2
N968511: LD10.1 R29.2
P0_1V: BC1.1 BC2.1 BC8.1 BC9.1 BC10.1 BC11.1 BC12.1 BC13.1 L1.1 TP3.1 U1.6 U1.8 U1.11 U1.22 U1.34 U1.40
P0_AUTOLOAD: LD1.2 R2.2 U1.23
P0_EN_PHY: LD3.2 R9.2 U1.25
P0_ETH_AN: J5.3 U1.37
P0_ETH_AP: J5.2 U1.36
P0_ETH_BN: J5.7 U1.39
P0_ETH_BP: J5.4 U1.38
P0_ETH_CN: J5.6 U1.2
P0_ETH_CP: J5.5 U1.1
P0_ETH_DN: J5.9 U1.4
P0_ETH_DP: J5.8 U1.3
P0_HSIN: C13.2 U1.13
P0_HSIP: C11.2 U1.12
P0_HSON: C7.2 U1.9
P0_HSOP: C9.2 U1.10 | length 0.3
  Top Layer w0.178: 59.436,56.388 59.668,56.156
P0_LED0: R53.1 TP1.1
P0_LED1: R55.1 TP2.1
P0_P3LED1: LD4.2 R12.2 U1.26
P0_RST: C2.1 R7.2 U1.33
P0_SCL: R4.2 U1.32
P0_SDA: R3.2 U1.31
P0_SMI_ADDR: LD2.2 R5.2 U1.24
P0_SMI_SEL: R14.1 R15.1 U1.27
P0_XTAL_I: C1.1 U1.30 Y1.1
P0_XTAL_O: C3.1 U1.29 Y1.3
P1_1V: BC14.1 BC15.1 BC21.1 BC22.1 BC23.1 BC24.1 BC25.1 BC26.1 L2.1 TP6.1 U2.6 U2.8 U2.11 U2.22 U2.34 U2.40
P1_AUTOLOAD: LD6.2 R17.2 U2.23
P1_EN_PHY: LD8.2 R24.2 U2.25
P1_ETH_AN: J6.3 U2.37
P1_ETH_AP: J6.2 U2.36
P1_ETH_BN: J6.7 U2.39
P1_ETH_BP: J6.4 U2.38
P1_ETH_CN: J6.6 U2.2
P1_ETH_CP: J6.5 U2.1
P1_ETH_DN: J6.9 U2.4
P1_ETH_DP: J6.8 U2.3
P1_HSIN: C14.2 U2.13
P1_HSIP: C12.2 U2.12
P1_HSON: C8.2 U2.9
P1_HSOP: C10.2 U2.10
P1_LED0: R54.1 TP4.1
P1_LED1: R56.1 TP5.1
P1_P3LED1: LD9.2 R27.2 U2.26
P1_RST: C6.1 R22.2 U2.33
P1_SCL: R19.2 U2.32
P1_SDA: R18.2 U2.31
P1_SMI_ADDR: LD7.2 R20.2 U2.24
P1_SMI_SEL: R29.1 R30.1 U2.27
P1_XTAL_I: C4.1 U2.30 Y2.1
P1_XTAL_O: C5.1 U2.29 Y2.3
SFP0_RXN: C13.1 J2.12 R41.2
SFP0_RXP: C11.1 J2.13 R39.2
SFP0_TXN: C7.1 J2.19 R31.1 R32.2
SFP0_TXP: C9.1 J2.18 R35.1 R36.2
SFP1_RXN: C14.1 J4.12 R42.2
SFP1_RXP: C12.1 J4.13 R40.2
SFP1_TXN: C8.1 J4.19 R33.1 R34.2
SFP1_TXP: C10.1 J4.18 R37.1 R38.2
SFP_3V3A: BC27.2 BC28.2 FB1.2 J1.1 J2.15 J2.16 R31.2 R35.2 R43.2 R44.2 R45.2 R46.2 R47.2
SFP_3V3B: BC29.2 BC30.2 FB2.2 J3.1 J4.15 J4.16 R33.2 R37.2 R48.2 R49.2 R50.2 R51.2 R52.2
pads on no net: J5. J6. J7.2
copper on no net: | length 68.8
  Top Layer w0.2: 31.741,74.295 v1(38.227,74.295) 40.141,74.295 ; v1(38.227,69.596) 39.047,69.596 ; 39.887,75.565 40.141,75.565 45.397,75.565 45.524,75.692 45.524,76.835 ; 39.887,76.835 42.799,76.835 44.069,78.105 45.651,78.105 ; 46.424,75.565 v1(47.371,75.565) ; 46.424,76.835 v1(47.371,76.835) ; 46.424,78.105 v1(47.244,78.105) ; 49.95,69.85 52.578,69.85 53.34,70.612 53.34,72.707 ; v1@53.086,67.945 54.864,67.945 ; 53.34,74.867 53.34,76.2 ; 55.499,73.983 55.499,74.803 ; 56.896,73.983 56.896,74.803
  Top Layer w0.6: 12.665,66.099 14.316,66.099 ; 14.316,66.226 17.839,66.226 18.542,66.929 24.575,66.929 ; 35.601,66.992 40.132,66.992 ; 40.141,67.7 40.141,71.755
  Top Layer w0.8: 26.733,66.929 31.201,66.929
  Top Layer w1: 40.141,73.025 44.577,73.025 45.3,72.302 45.3,69.85
  other v1: 51.689,67.437 53.213,67.945 51.689,68.453 40.259,68.58 53.213,68.834 20.574,69.088 22.606,69.088 21.717,69.215 51.689,69.342 53.213,69.85 51.689,70.358 53.213,70.866 51.689,71.247 30.861,73.025 32.639,73.025 55.499,75.057 56.896,75.057 30.861,75.565 32.639,75.565 53.34,75.946
  other v2: 42.346,11.189 42.346,20.789 42.219,44.534 42.219,54.134

## Polygon pours and split planes (outlines as drawn)
+3.3V on Mid-Layer 1 "3.3V" (solid, remove dead copper, pour order 21): -6.731,170.307 -6.604,170.18 -6.604,87.757 117.475,87.757 117.602,87.63 117.602,106.172 117.602,169.926 117.983,170.307
AGND on Top Layer "Top Layer-AGND" (solid, pour order 30): 54.891,117.272 51.665,114.046 51.665,104.902 53.824,102.743 68.302,102.743 74.525,108.966 74.525,116.205 73.593,117.137
AGND on Top Layer "TOP-GND" (solid, remove dead copper, pour order 28): -3.683,133.223 -5.715,130.647 -5.715,124.691 -5.715,113.101 -4.064,111.009 -1.778,108.111 20.32,108.111 39.878,108.111 43.18,112.296 45.593,115.355 45.593,124.369 45.593,128.072 41.91,132.74 41.402,133.384 41.275,133.384
AGND on Mid-Layer 2 "GND" (solid, remove dead copper, pour order 11): -6.749,170.198 -6.622,170.071 -6.622,87.14 118.346,87.14 117.457,88.029 117.457,169.817
AGND on Bottom Layer "GND-BOT" (solid, remove dead copper, pour order 26): -5.987,181.084 -6.495,181.084 -9.543,178.036 -13.353,174.226 -13.353,124.823 -13.353,95.359 -7.003,89.009 -4.082,86.088 117.584,86.088 117.584,87.739 121.394,91.549 118.727,94.216 118.727,165.717 118.727,177.528 116.441,179.814

## Keep-outs
Keep-Out Layer:
  lines w0.254: 0,0 121,0 121,66.675 0,66.675 0,0

## Other copper
Top Layer:
  pour cut-out: 38.741,73.625 38.741,72.425 38.903,72.263 43.053,72.263 43.561,71.755 43.561,66.214 44.116,65.659 52.959,65.659 54.61,67.31 54.61,73.279 53.848,74.041 42.418,74.041 42.018,73.641 38.741,73.641
  region: 49.911,73.279 57.023,73.279 57.404,72.898 57.404,72.263 57.023,71.882 54.356,71.882 53.721,71.247 53.721,67.437 52.578,66.294 50.8,66.294 49.911,67.183
Mid-Layer 1:
  pour cut-out: 2.286,136.398 2.286,87.884 114.3,87.884 114.554,87.63 114.554,136.398 100.203,136.398 100.076,136.271 100.076,101.473 16.891,101.473 16.764,101.6 16.764,136.398
Mid-Layer 2:
  rectangle: 11.684,70.739 17.018,73.914
  pour cut-out: 0.503,144.066 1.217,144.78 16.383,144.78 17.145,144.018 17.145,106.426 17.907,105.664 96.139,105.664 97.917,107.442 97.917,143.307 99.898,145.288 112.522,145.288 115.443,142.367 115.443,93.726 116.713,92.456 117.094,92.837 119.38,92.837 119.38,95.885 119.634,96.139 118.364,97.409 118.364,144.526 115.697,147.193 99.06,147.193 95.631,143.764 95.631,131.826 91.694,127.889 22.225,127.889 21.298,128.816 21.298,141.262 15.24,147.32 0.381,147.32 -5.461,141.478 -5.461,92.964 -5.207,92.964 -4.191,91.948 -4.064,92.075 0.503,92.075
  pour cut-out: 51.562,72.136 50.8,71.374 50.8,67.183 51.435,66.548 53.594,66.548 54.102,67.056 54.102,71.374 53.34,72.136
Bottom Layer:
  pour cut-out: -0.132,137.716 0.582,138.43 15.748,138.43 16.51,137.668 16.51,100.076 17.272,99.314 95.504,99.314 97.282,101.092 97.282,136.957 99.263,138.938 111.887,138.938 114.808,136.017 114.808,87.376 116.078,86.106 116.459,86.487 118.745,86.487 118.745,89.535 118.999,89.789 117.729,91.059 117.729,138.176 115.062,140.843 98.425,140.843 94.996,137.414 94.996,125.476 91.059,121.539 21.59,121.539 20.663,122.466 20.663,134.912 14.605,140.97 -0.254,140.97 -6.096,135.128 -6.096,86.614 -5.842,86.614 -4.826,85.598 -4.699,85.725 -0.132,85.725
  pour cut-out: 49.276,73.596 49.276,66.23 53.594,66.23 53.975,66.611 53.975,73.343 53.721,73.596

## Silkscreen, mask and mechanical layers (free items; w line width, h text height)
Top Overlay:
  text "Engineering Sample V1.0" at 93.218,73.914 h1
  text "Designed By: Hans Kim" at 93.218,71.882 h1
  text "RXD" at 111.633,65.659 h1
  text "TXD" at 111.633,63.246 h1
  text "RESET" at 69.977,35.687 h1